# EAGLE board megacard_pipico (EAGLE 4.16)
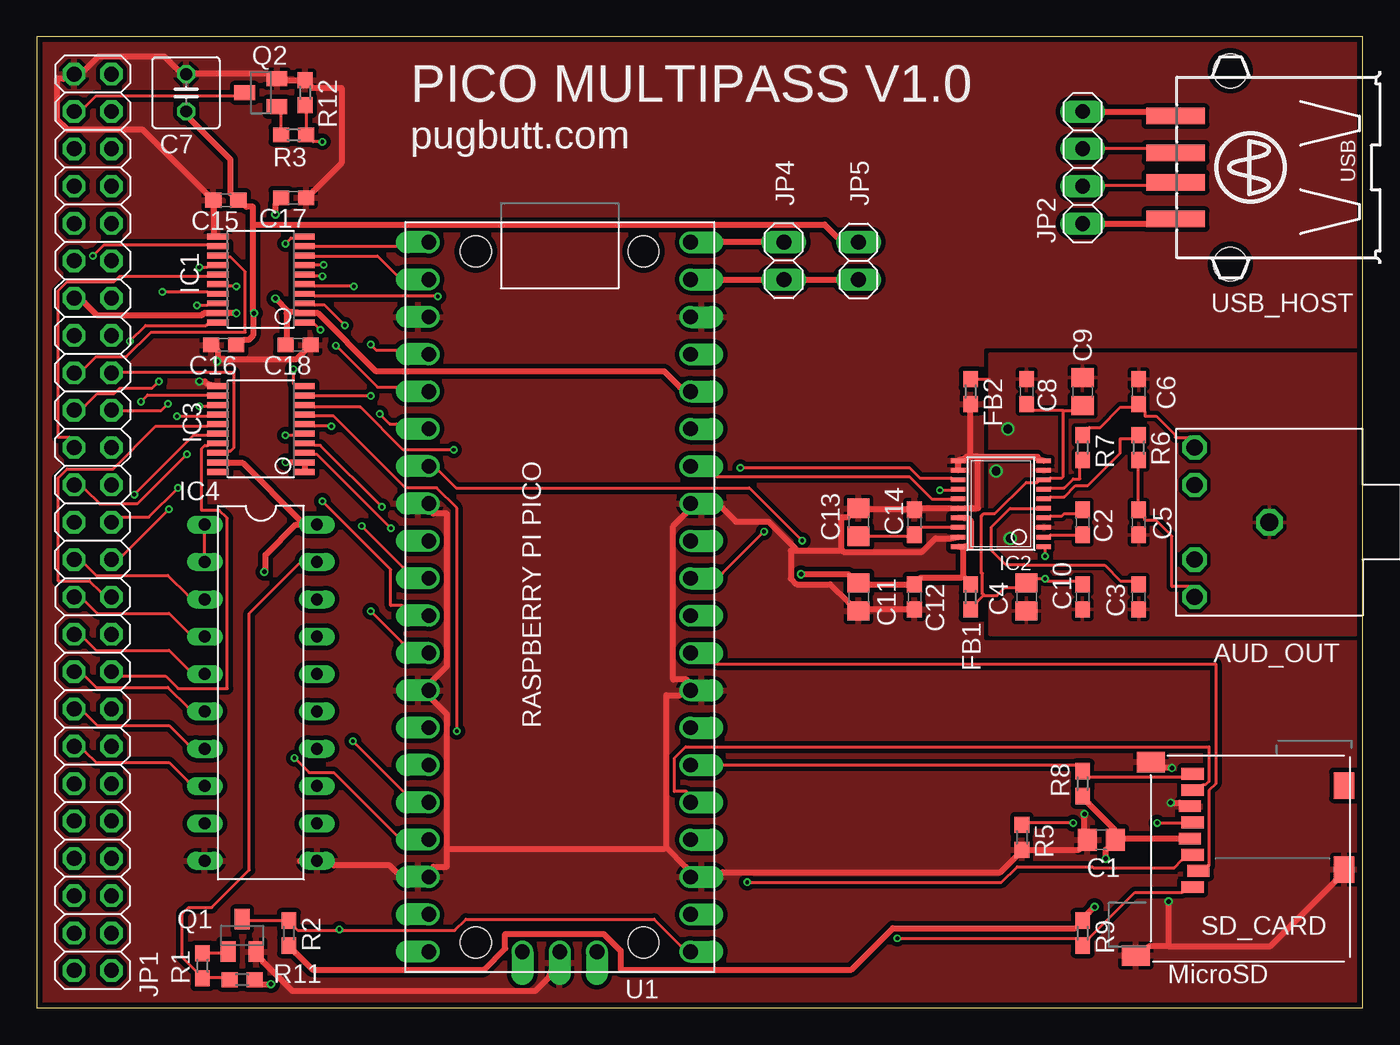
[diagram p0: board, top side]
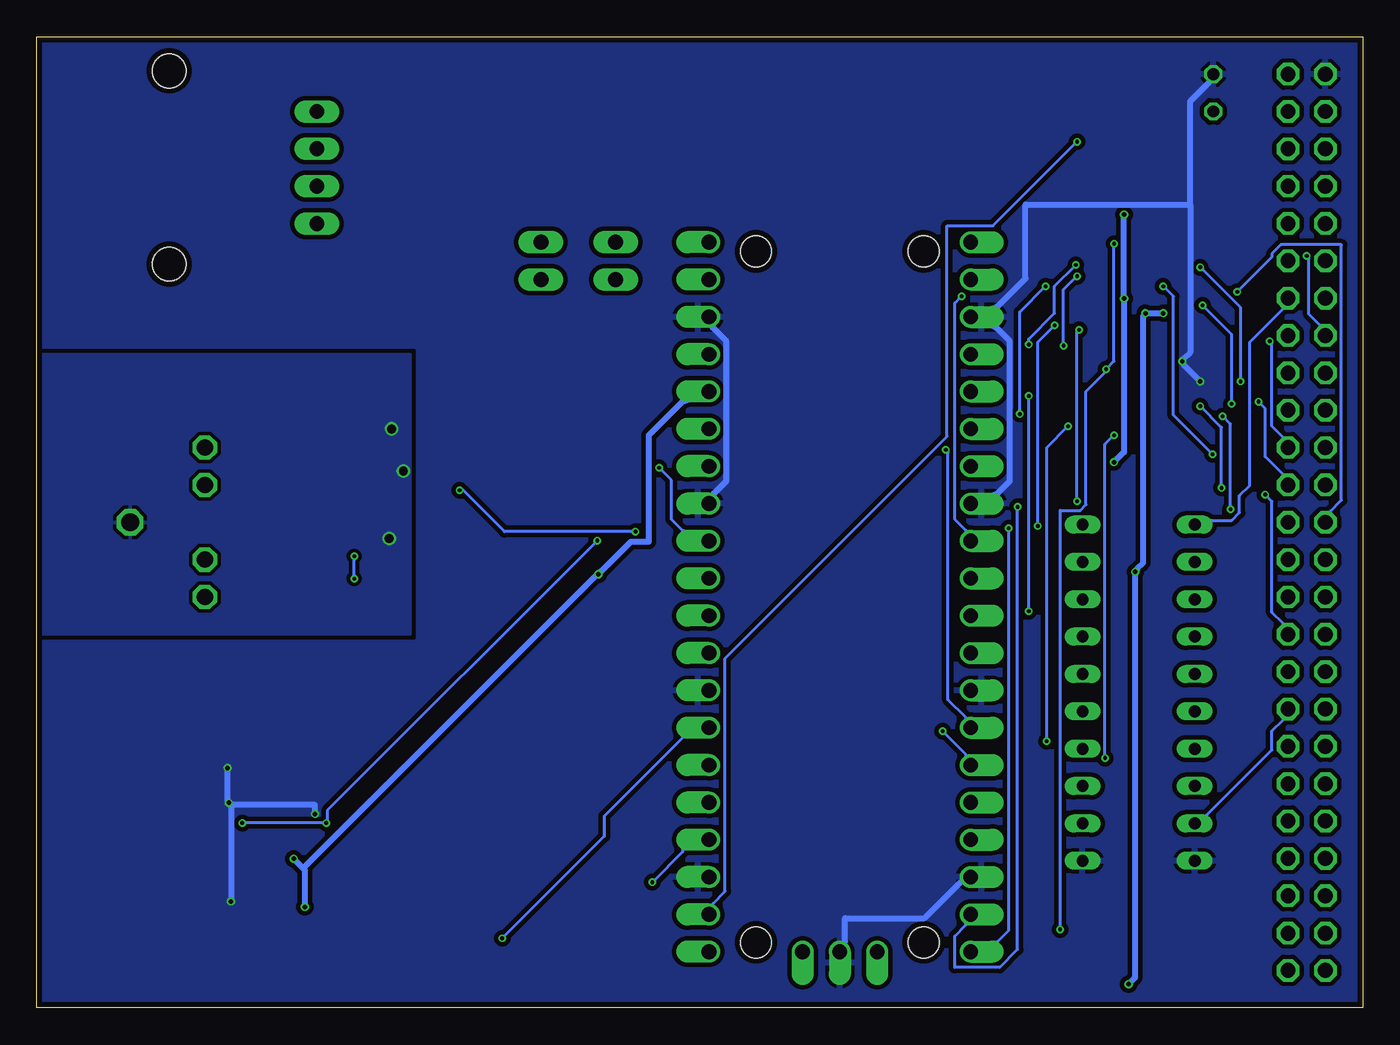
[diagram p1: board, bottom side, seen from below]

Size 90.17 x 66.04 mm. Coordinates in mm from the lower left corner, seen from the top.
Outline: 0,0 90.17,0 90.17,66.04 0,66.04 0,0
Copper layers (1*16): Top 0.0356mm / dielectric 1.6mm / Bottom 0.0356mm
Design rules "oshpark-2layer": minimum track width 6mil, minimum drill 10mil, track to track 6mil, track to pad 6mil, pad to pad 6mil, via to via 6mil, smd to smd 6mil, copper to edge 15mil, drill to drill 6mil, minimum pad ring 5mil, minimum via ring 5mil, stop-mask expansion 2.5mil, vias tented up to drill 0mil, thermal gap 10mil
Net classes: 0 default: width 0.203 mm, drill 0.203 mm, clearance 0.254 mm; 1 supply: width 0.406 mm, drill 0.203 mm, clearance 0.305 mm

## Footprints (pad centres in the part's own frame; a part is rotated, then mirrored left to right if it is on the bottom)
3.5MM_HPHONE_DIN = drill 1.2 octagon: COM 0,5.08 | drill 1.1 octagon: L 5.08,0; LSW 2.54,0; R -5.08,0; RSW -2.54,0
C0805 = smd 1.3 x 1.5: 1 -0.95,0; 2 0.95,0
C0603 = smd 1.1 x 1: 1 -0.85,0; 2 0.85,0
C025-050X050 = drill 0.813 octagon: 1 -1.27,0; 2 1.27,0
R0603 = smd 1.1 x 1: 1 -0.85,0; 2 0.85,0
TSSOP20 = smd 1.5 x 0.35: 1 -2.925,2.925; 2 -2.925,2.275; 3 -2.925,1.625; 4 -2.925,0.975; 5 -2.925,0.325; 6 -2.925,-0.325; 7 -2.925,-0.975; 8 -2.925,-1.625; 9 -2.925,-2.275; 10 -2.925,-2.925; 11 2.925,-2.925; 12 2.925,-2.275; 13 2.925,-1.625; 14 2.925,-0.975; 15 2.925,-0.325; 16 2.925,0.325; 17 2.925,0.975; 18 2.925,1.625; 19 2.925,2.275; 20 2.925,2.925
TSSOP20' = smd 0.305 x 0.991: 1 -2.925,-2.918; 2 -2.275,-2.918; 3 -1.625,-2.918; 4 -0.975,-2.918; 5 -0.325,-2.918; 6 0.325,-2.918; 7 0.975,-2.918; 8 1.625,-2.918; 9 2.275,-2.918; 10 2.925,-2.918; 11 2.925,2.918; 12 2.275,2.918; 13 1.625,2.918; 14 0.975,2.918; 15 0.325,2.918; 16 -0.325,2.918; 17 -0.975,2.918; 18 -1.625,2.918; 19 -2.275,2.918; 20 -2.925,2.918
DIL20 = drill 0.813 long: 1 -11.43,-3.81; 2 -8.89,-3.81; 3 -6.35,-3.81; 4 -3.81,-3.81; 5 -1.27,-3.81; 6 1.27,-3.81; 7 3.81,-3.81; 8 6.35,-3.81; 9 8.89,-3.81; 10 11.43,-3.81; 11 11.43,3.81; 12 8.89,3.81; 13 6.35,3.81; 14 3.81,3.81; 15 1.27,3.81; 16 -1.27,3.81; 17 -3.81,3.81; 18 -6.35,3.81; 19 -8.89,3.81; 20 -11.43,3.81
2X25 = drill 1.016 octagon: 1 -30.48,-1.27; 2 -30.48,1.27; 3 -27.94,-1.27; 4 -27.94,1.27; 5 -25.4,-1.27; 6 -25.4,1.27; 7 -22.86,-1.27; 8 -22.86,1.27; 9 -20.32,-1.27; 10 -20.32,1.27; 11 -17.78,-1.27; 12 -17.78,1.27; 13 -15.24,-1.27; 14 -15.24,1.27; 15 -12.7,-1.27; 16 -12.7,1.27; 17 -10.16,-1.27; 18 -10.16,1.27; 19 -7.62,-1.27; 20 -7.62,1.27; 21 -5.08,-1.27; 22 -5.08,1.27; 23 -2.54,-1.27; 24 -2.54,1.27; 25 0,-1.27; 26 0,1.27; 27 2.54,-1.27; 28 2.54,1.27; 29 5.08,-1.27; 30 5.08,1.27; 31 7.62,-1.27; 32 7.62,1.27; 33 10.16,-1.27; 34 10.16,1.27; 35 12.7,-1.27; 36 12.7,1.27; 37 15.24,-1.27; 38 15.24,1.27; 39 17.78,-1.27; 40 17.78,1.27; 41 20.32,-1.27; 42 20.32,1.27; 43 22.86,-1.27; 44 22.86,1.27; 45 25.4,-1.27; 46 25.4,1.27; 47 27.94,-1.27; 48 27.94,1.27; 49 30.48,-1.27; 50 30.48,1.27
1X04 = drill 1.016 long: 1 -3.81,0; 2 -1.27,0; 3 1.27,0; 4 3.81,0
1X02 = drill 1.016 long: 1 -1.27,0; 2 1.27,0
SOT23-BEC = smd 1 x 1.4: B -0.95,-1.1; C 0,1.1; E 0.95,-1.1
MICROSD_AMPHENOL_GTFP08432B1HR = smd 0.8 x 1.5: 1/DAT2 1.95,-10.3; 2/CD/DAT3 0.85,-9.9; 3/CMD -0.25,-10.3; 4/VDD -1.35,-10.5; 5/CLK -2.45,-10.3; 6/VSS -3.55,-10.5; 7/DAT0 -4.65,-10.3; 8/DAT1 -5.75,-10.3 | smd 1.8 x 1.4: CDET -4.95,0; GND0 0.75,0 | smd 1.4 x 1.9: GND1 -6.55,-13.15; GND2 6.6,-14.15
PI_PICO = drill 1 offset: 1 -8.89,24.13; 2 -8.89,21.59; 3 -8.89,19.05; 4 -8.89,16.51; 5 -8.89,13.97; 6 -8.89,11.43; 7 -8.89,8.89; 8 -8.89,6.35; 9 -8.89,3.81; 10 -8.89,1.27; 11 -8.89,-1.27; 12 -8.89,-3.81; 13 -8.89,-6.35; 14 -8.89,-8.89; 15 -8.89,-11.43; 16 -8.89,-13.97; 17 -8.89,-16.51; 18 -8.89,-19.05; 19 -8.89,-21.59; 20 -8.89,-24.13; 21 8.89,-24.13; 22 8.89,-21.59; 23 8.89,-19.05; 24 8.89,-16.51; 25 8.89,-13.97; 26 8.89,-11.43; 27 8.89,-8.89; 28 8.89,-6.35; 29 8.89,-3.81; 30 8.89,-1.27; 31 8.89,1.27; 32 8.89,3.81; 33 8.89,6.35; 34 8.89,8.89; 35 8.89,11.43; 36 8.89,13.97; 37 8.89,16.51; 38 8.89,19.05; 39 8.89,21.59; 40 8.89,24.13; D1 -2.54,-24.13; D2 0,-24.13; D3 2.54,-24.13 | hole 2.1: -5.7,23.5; 5.7,23.5; 5.7,-23.5; -5.7,-23.5
USB-A003 = smd 1.12 x 4: 1 -3.5,14; 2 -1,14; 3 1,14; 4 3.5,14 | hole 2.3: -6.57,10.28; 6.57,10.28

## Placement (x,y rotation side)
AUD_OUT  HPHONE_JACK_DIN  [3.5MM_HPHONE_DIN]  78.74,33.02 270 top
C1  10u  [C0805]  72.39,11.43 180 top
C2  2.2u  [C0603]  71.12,33.02 270 top
C3  2.2u  [C0603]  74.93,27.94 90 top
C4  10u  [C0805]  67.31,27.94 90 top
C5  2.2u  [C0603]  74.93,33.02 90 top
C6  2.2u  [C0603]  74.93,41.91 270 top
C7  220U  [C025-050X050]  10.16,62.23 90 top
C8  0.1u  [C0603]  67.31,41.91 270 top
C9  10u  [C0805]  71.12,41.91 270 top
C10  0.1u  [C0603]  71.12,27.94 90 top
C11  10u  [C0805]  55.88,27.94 270 top
C12  0.1u  [C0603]  59.69,27.94 270 top
C13  10u  [C0805]  55.88,33.02 90 top
C14  0.1u  [C0603]  59.69,33.02 90 top
C15  0.1u  [C0603]  12.86,54.93 180 top
C16  0.1u  [C0603]  12.7,45.09 180 top
C17  0.1u  [C0603]  17.46,55.09 180 top
C18  0.1u  [C0603]  17.78,45.09 180 top
FB1  [R0603]  63.5,27.94 90 top
FB2  [R0603]  63.5,41.91 270 top
IC1  TXS0108E  [TSSOP20]  15.24,49.53 180 top
IC2  PCM5101A  [TSSOP20']  65.56,34.29 90 top
IC3  TXS0108E  [TSSOP20]  15.24,39.37 180 top
IC4  PLD_ATF16V8B  [DIL20]  15.24,21.43 270 top
JP1  [2X25]  3.81,33.02 270 top
JP2  [1X04]  71.12,57.15 90 top
JP4  [1X02]  50.8,50.8 270 top
JP5  [1X02]  55.88,50.8 90 top
Q1  BC849SMD  [SOT23-BEC]  13.97,4.92 0 top
Q2  BC849SMD  [SOT23-BEC]  15.24,62.23 90 top
R1  680R  [R0603]  11.27,2.86 90 top
R2  4.7K  [R0603]  17.14,5.08 270 top
R3  680R  [R0603]  17.46,59.37 180 top
R5  10K  [R0603]  66.99,11.59 270 top
R6  470  [R0603]  74.93,38.1 90 top
R7  470  [R0603]  71.12,38.1 270 top
R8  10K  [R0603]  71.12,15.24 90 top
R9  10K  [R0603]  71.12,5.08 270 top
R11  10K  [R0603]  13.97,1.91 0 top
R12  10K  [R0603]  18.26,62.23 270 top
SD_CARD  MICROSD_AMPHENOL_GTFP084328  [MICROSD_AMPHENOL_GTFP08432B1HR]  88.9,10.16 270 top
U1  PI_PICO  [PI_PICO]  35.56,27.94 0 top
USB_HOST  [USB-A003]  91.44,57.15 90 top

## Library data of the parts
AUD_OUT IC2 = 01-hacker-daw
C1-C18 FB1 FB2 R1-R3 R5-R9 R11 R12 = rcl
IC1 IC3 IC4 SD_CARD U1 = 07-Retrocomputing
JP1 JP2 JP4 JP5 = pinhead
Q1 Q2 = transistor-npn
USB_HOST = con-yamaichi

## Nets
+3V3 [supply]: C1.1 C11.1 C12.1 C17.2 C18.2 FB1.2 IC1.2 IC2.17 IC2.20 IC3.1 IC3.2 R2.2 R8.1 R9.1 SD_CARD.4/VDD U1.36
+5V [supply]: C7.1 C15.1 C16.1 IC1.19 IC3.19 IC4.20 JP1.13 JP5.2 R11.2
/BREQ: JP1.16
/FIRQ: JP1.7
/HALT: JP1.2
/IO: IC4.9 JP1.36
/IRQ: JP1.5
/MRDY: JP1.10
/NMI: JP1.3 Q2.C
/NOMEM: JP1.38
/RD: JP1.4
/RES: JP1.8
/WR: JP1.6
_A0: IC1.9 U1.1
_A1: IC1.8 U1.2
_A2: IC1.7 U1.4
_A3: IC1.6 U1.5
_A4: IC1.5 U1.6
_A5: IC1.4 U1.9
_D0: IC1.3 U1.10
_D1: IC1.1 U1.11
_D2: IC3.9 U1.12
_D3: IC3.8 U1.14
_D4: IC3.7 U1.15
_D5: IC3.6 U1.16
_D6: IC3.5 U1.17
_D7: IC3.4 U1.19
_R//W: IC3.3 U1.20
A0: IC1.12 JP1.15
A1: IC1.13 JP1.17
A2: IC1.14 JP1.19
A3: IC1.15 JP1.21
A4: IC1.16 JP1.23
A5: IC1.17 JP1.25
A6: IC4.3 JP1.27
A7: IC4.4 JP1.29
A8: IC4.5 JP1.31
A9: IC4.6 JP1.33
A10: IC4.7 JP1.35
A11: IC4.8 JP1.37
A12: JP1.39
A13: JP1.41
A14: JP1.43
A15: JP1.45
A16: JP1.47
A17: JP1.49
A18: JP1.50
A19: JP1.48
A20: JP1.46
A21: JP1.44
A22: JP1.42
A23: JP1.40
AGND: AUD_OUT.COM C3.1 C4.1 C5.1 C6.1 C8.1 C9.1 C10.1 FB2.1 IC2.3 IC2.9
BA: JP1.11
BCK: IC2.13 U1.32
BS: JP1.9
CS: IC1.10 IC3.10 Q1.C R2.1 U1.21
D0: IC1.18 JP1.20
D1: IC1.20 JP1.22
D2: IC3.12 JP1.24
D3: IC3.13 JP1.26
D4: IC3.14 JP1.28
D5: IC3.15 JP1.30
D6: IC3.16 JP1.32
D7: IC3.17 JP1.34
DOUT: IC2.14 U1.31
ECLK: IC4.1 IC4.2 JP1.14
GND [supply]: C1.2 C7.2 C11.2 C12.2 C13.2 C14.2 C15.2 C16.2 C17.1 C18.1 FB2.2 IC1.11 IC2.10 IC2.11 IC2.12 IC2.16 IC2.19 IC3.11 IC4.10 IC4.11 JP1.1 Q1.E Q2.E R5.2 R12.1 SD_CARD.6/VSS SD_CARD.GND0 SD_CARD.GND1 SD_CARD.GND2 U1.3 U1.8 U1.13 U1.18 U1.23 U1.28 U1.33 U1.38 U1.D2
INT: R3.1 R12.2 U1.22
LDOO: C13.1 C14.1 IC2.18
LRCLK: IC2.15 U1.34
N$1 [supply]: JP2.1 USB_HOST.1
N$2: JP2.2 USB_HOST.2
N$3: JP2.3 USB_HOST.3
N$4 [supply]: JP2.4 USB_HOST.4
N$5: Q1.B R1.2
N$6 [supply]: JP4.1 U1.40
N$8 [supply]: JP4.2 JP5.1 U1.39
N$19: Q2.B R3.2
N$21: AUD_OUT.L C5.2 R6.1
N$22: AUD_OUT.R C6.2 R7.1
N$23: C2.2 IC2.2
N$24: C2.1 IC2.4
N$26: C3.2 IC2.5
N$27: IC2.6 R6.2
N$28: IC2.7 R7.2
PCS: IC4.19 R1.1 R11.1
QCLK: JP1.12
R//W: IC3.18 JP1.18
SD_CLK: R5.1 SD_CARD.5/CLK U1.7
SD_CND: SD_CARD.3/CMD U1.24
SD_DAT0: SD_CARD.7/DAT0 U1.25
SD_DAT1: R8.2 SD_CARD.8/DAT1 U1.26
SD_DAT2: R9.2 SD_CARD.1/DAT2 U1.27
SD_DAT3: SD_CARD.2/CD/DAT3 U1.29
VDD: C4.2 C8.2 C9.2 C10.2 FB1.1 IC2.1 IC2.8

## Tracks (layer width: path | path; a pad name or v marks a point on that pad's centre or on a via)
+3V3  (via drill 0.3)
  Top 0.406: R8.1 71.55,13.87 73.3,12.12 C1.1 | SD_CARD.4/VDD 77.72,11.51 73.91,11.51 C1.1 | R2.2 17.6,3.73 18.75,2.59 30.4,2.59 31.85,4.04 31.85,5.03 38.56,5.03 39.7,3.89 39.7,2.59 55.4,2.59 58.22,5.41 70.64,5.41 R9.1 71.55,6.48 v71.93,6.86 | v72.69,10.13 72.69,10.74 C1.1 | 63.02,29.34 63.02,31.24 IC2.20 63.09,31.39 63.55,31.39 63.55,33.07 63.32,33.3 63.09,33.3 IC2.17 | 63.02,29.34 FB1.2 | 63.02,29.34 62.87,29.26 60.12,29.26 C12.1 59.21,28.8 56.62,28.8 C11.1 55.17,29.49 v51.97,29.49 | IC3.1 18.21,36.58 18.21,36.96 IC3.2 17.45,37.11 v16.92,37.11 | v16.23,53.95 16.23,54.63 C17.2 | 17.11,47.36 17.14,47.32 17.45,47.32 IC1.2 18.9,47.24 19.13,47.24 23.09,43.28 42.67,43.28 43.74,42.22 U1.36 | 17.11,47.36 v16.23,48.23 | C18.2 16.99,45.57 16.99,47.24 17.11,47.36
  Bottom 0.406: 72.05,9.49 71.93,9.37 v71.93,6.86 | 72.05,9.49 v72.69,10.13 | v16.23,53.95 v16.23,48.23 16.23,37.8 v16.92,37.11 | U1.36 46.25,41.22 48.54,38.94 48.54,31.7 49.76,31.7 v51.97,29.49 52.2,29.34 72.05,9.49
+5V  (via drill 0.3)
  Top 0.406: v15.93,1.6 15.32,1.6 R11.2 | IC3.19 13.03,37.03 14.02,37.03 17.91,33.15 IC4.20 17.62,32.86 15.56,30.8 15.56,29.69 v15.47,29.64 | JP1.13 3.28,47.93 4.12,47.09 11.2,47.09 11.35,47.24 11.58,47.24 IC1.19 13.03,47.24 v13.56,47.24 | 14.71,53.26 14.71,54.48 14.25,54.48 C15.1 13.18,55.4 13.18,57.68 10.44,60.43 C7.1 | 14.71,47.24 14.71,53.26 | 14.71,47.24 14.71,45.72 14.4,45.41 14.1,45.41 C16.1 | JP5.2 54.41,52.43 53.57,53.26 14.71,53.26 | v14.78,47.24 14.71,47.24
  Bottom 0.406: v15.93,1.6 15.47,2.06 v15.47,29.64 15.32,29.87 14.94,30.25 14.94,47.02 v14.78,47.24 v13.56,47.24
/IO
  Bottom 0.203: IC4.9 10.59,13.11 6.17,17.53 6.17,18.82 5.41,19.58 JP1.36
/NMI
  Top 0.203: Q2.C 13.49,62.03 4.04,62.03 3.28,61.27 JP1.3
_A0
  Top 0.203: IC1.9 18.9,51.82 24.46,51.82 U1.1
_A1
  Top 0.203: IC1.8 18.9,51.13 23.16,51.13 24.46,49.84 U1.2
_A2  (via drill 0.25)
  Top 0.203: v19.51,50.52 18.9,50.52 IC1.7 | v22.71,45.11 23.09,44.73 24.46,44.73 U1.4
  Bottom 0.203: v19.51,50.52 20.95,49.07 20.95,47.24 22.71,45.49 v22.71,45.11
_A3  (via drill 0.25)
  Top 0.203: v19.43,49.76 18.9,49.76 IC1.6 | v20.34,45.03 23.16,42.22 24.46,42.22 U1.5
  Bottom 0.203: v19.43,49.76 20.34,48.84 v20.34,45.03
_A4  (via drill 0.25)
  Top 0.203: v21.57,49.07 18.9,49.07 IC1.5 | v23.32,40.39 24,39.7 24.46,39.7 U1.6
  Bottom 0.203: v21.57,49.07 23.32,47.32 v23.32,40.39
_A5  (via drill 0.25)
  Top 0.203: v27.28,48.39 18.9,48.39 IC1.4
  Bottom 0.203: v27.28,48.39 27.74,47.93 27.74,33.22 26.98,32.46 U1.9
_D0  (via drill 0.25)
  Top 0.203: v20.95,46.41 19.58,47.78 18.9,47.78 IC1.3 | v22.1,32.77 24.92,29.95 U1.10
  Bottom 0.203: v20.95,46.41 22.1,45.26 v22.1,32.77
_D1  (via drill 0.25)
  Top 0.203: v19.28,46.1 18.9,46.48 IC1.1 | v19.43,34.44 24.08,29.79 24.08,27.36 24.84,27.36 U1.11
  Bottom 0.203: v19.28,46.1 19.43,45.95 v19.43,34.44
_D2  (via drill 0.25)
  Top 0.203: v22.71,41.6 18.9,41.6 IC3.9 | v22.71,26.98 24.84,24.84 U1.12
  Bottom 0.203: v22.71,26.98 v22.71,41.6
_D3  (via drill 0.25)
  Top 0.203: v28.35,37.95 24.92,37.95 22.02,40.84 18.9,40.84 IC3.8
  Bottom 0.203: v28.35,37.95 28.19,37.8 28.19,20.95 26.98,19.74 U1.14
_D4  (via drill 0.25)
  Top 0.203: v28.57,18.82 28.57,33.98 27.2,35.36 25.07,35.36 20.19,40.23 18.9,40.23 IC3.7
  Bottom 0.203: v28.57,18.82 26.98,17.22 U1.15
_D5  (via drill 0.25)
  Top 0.203: v20.04,39.55 18.9,39.55 IC3.6 | v21.49,18.14 24.92,14.71 U1.16
  Bottom 0.203: v20.04,39.55 21.49,38.1 v21.49,18.14
_D6  (via drill 0.25)
  Top 0.203: v16.92,38.94 17.45,38.94 IC3.5 | v17.53,16.99 18.52,16 20.19,16 24.46,11.73 U1.17
  Bottom 0.203: v16.92,38.94 17.53,38.33 v17.53,16.99
_D7  (via drill 0.25)
  Top 0.203: v23.47,34.06 19.28,38.25 18.9,38.25 IC3.4
  Bottom 0.203: v23.47,34.06 23.47,3.96 24.69,2.74 27.74,2.74 27.74,4.88 26.98,5.64 U1.19
_R//W  (via drill 0.25)
  Top 0.203: v24.08,32.61 19.05,37.64 18.9,37.64 IC3.3
  Bottom 0.203: v24.08,32.61 24.08,5.26 24.84,4.5 U1.20
A0  (via drill 0.25)
  Top 0.203: v3.81,51.13 4.57,51.89 11.58,51.89 IC1.12
  Bottom 0.203: v3.81,51.13 3.66,50.98 3.66,47.17 2.9,46.41 JP1.15
A1
  Top 0.203: IC1.13 13.03,51.05 13.18,51.05 14.17,50.06 14.17,45.95 7.77,45.95 6.1,44.27 4.04,44.27 3.28,43.51 JP1.17
A2  (via drill 0.25)
  Top 0.203: v11.05,50.37 11.58,50.37 IC1.14 | v8.31,42.6 7.85,42.14 5.64,42.14 5.26,41.76 4.12,41.76 3.28,40.92 JP1.19
  Bottom 0.203: v11.05,50.37 8.31,47.62 v8.31,42.6
A3
  Top 0.203: IC1.15 11.58,49.76 5.64,49.76 5.26,49.38 2.06,49.38 1.45,48.77 1.45,38.79 2.21,38.79 JP1.21
A4  (via drill 0.25)
  Top 0.203: v13.56,49.07 13.03,49.07 IC1.16 | v10.21,37.64 6.86,34.29 4.27,34.29 3.28,35.28 JP1.23
  Bottom 0.203: v13.56,49.07 12.88,48.39 12.88,40.31 v10.21,37.64
A5  (via drill 0.25)
  Top 0.203: v8.53,48.69 11.58,48.69 IC1.17
  Bottom 0.203: v8.53,48.69 6.17,51.05 6.17,51.28 5.56,51.89 1.45,51.89 1.45,34.52 2.21,33.76 JP1.25
A6
  Top 0.203: IC4.3 10.29,28.04 8.91,29.41 4.04,29.41 3.28,30.18 JP1.27
A7
  Top 0.203: IC4.4 10.29,25.53 8.99,26.82 4.12,26.82 3.28,27.66 JP1.29
A8
  Top 0.203: IC4.5 10.29,23.01 8.99,24.31 4.04,24.31 3.28,25.07 JP1.31
A9
  Top 0.203: IC4.6 10.29,20.42 8.91,21.79 4.04,21.79 3.28,22.55 JP1.33
A10
  Top 0.203: IC4.7 10.29,17.91 8.99,19.2 4.12,19.2 3.28,20.04 JP1.35
A11
  Top 0.203: IC4.8 10.29,15.39 8.99,16.69 4.04,16.69 3.28,17.45 JP1.37
AGND  (via drill 0.6)
  Top 0.203: FB2.1 63.93,42.75 64.77,42.75
  other vias: 66.04,39.37 65.25,36.51 66.2,31.91
  pour Bottom: 90.17,44.45 64.77,44.45 64.77,25.4 90.17,25.4
  pour Top: 64.77,44.45 64.77,25.4 90.17,25.4 90.17,44.45
BCK  (via drill 0.25)
  Top 0.203: v47.85,36.73 59.36,36.73 60.05,36.04 62.18,36.04 IC2.13
  Bottom 0.203: v47.85,36.73 47.02,35.89 47.02,33.22 46.25,32.46 U1.32
CS  (via drill 0.25)
  Top 0.203: v17.45,43.43 17.45,42.44 IC3.10 | v16.92,51.97 17.3,52.35 17.45,52.35 IC1.10 | Q1.C 14.4,5.94 16.69,5.94 R2.1 17.6,5.41 17.75,5.26 20.57,5.26 | 20.57,5.26 28.42,5.26 29.18,6.02 41.99,6.02 43.81,4.19 U1.21 | 20.57,5.26 v20.57,5.33
  Bottom 0.203: v16.92,51.97 16.92,43.97 v17.45,43.43 17.53,43.2 18.82,41.91 18.82,34.21 19.2,33.83 20.57,33.83 v20.57,5.33
D0  (via drill 0.25)
  Top 0.203: v10.9,47.78 11.58,47.78 IC1.18 | v8.91,41.07 8.46,40.62 5.79,40.62 JP1.20
  Bottom 0.203: v10.9,47.78 8.91,45.8 v8.91,41.07
D1  (via drill 0.25)
  Top 0.203: v6.33,45.34 7.39,46.41 11.51,46.41 11.58,46.48 IC1.20
  Bottom 0.203: v6.33,45.34 6.17,45.19 6.17,39.55 5.41,38.79 JP1.22
D2  (via drill 0.25)
  Top 0.203: v7.09,41.22 7.54,41.68 11.58,41.68 IC3.12
  Bottom 0.203: v7.09,41.22 6.63,40.77 6.63,37.49 5.41,36.27 JP1.24
D3  (via drill 0.25)
  Top 0.203: v11.05,40.92 11.58,40.92 IC3.13 | v9.6,35.36 7.62,33.38 5.79,33.38 JP1.26
  Bottom 0.203: v11.05,40.92 9.6,39.47 v9.6,35.36
D4  (via drill 0.25)
  Top 0.203: v9.53,40.23 11.58,40.23 IC3.14 | v8.99,33.91 5.87,30.79 5.79,30.79 JP1.28
  Bottom 0.203: v9.53,40.23 8.99,39.7 v8.99,33.91
D5
  Top 0.203: IC3.15 11.58,39.55 8.08,39.55 5.18,36.65 2.06,36.65 1.45,36.04 1.45,29.03 3.58,29.03 4.34,28.27 JP1.30
D6  (via drill 0.25)
  Top 0.203: v6.63,34.9 10.67,38.94 11.58,38.94 IC3.16
  Bottom 0.203: v6.63,34.9 6.17,34.44 6.17,26.9 5.41,26.14 JP1.32
D7
  Top 0.203: IC3.17 11.58,38.25 11.43,38.25 11.2,38.02 11.2,33.83 12.42,33.83 12.95,33.3 12.95,21.72 9.6,21.72 8.76,22.55 5.79,22.55 JP1.34
DOUT  (via drill 0.25)
  Top 0.203: v61.42,35.2 62.18,35.2 IC2.14 | v49.45,32.38 46.63,29.57 U1.31
  Bottom 0.203: v61.42,35.2 61.19,35.2 58.37,32.38 v49.45,32.38
ECLK
  Top 0.203: IC4.2 IC4.1
  Bottom 0.203: JP1.14 5.41,47.55 7.7,45.26 7.7,35.51 8.38,34.82 8.38,33.68 8.91,33.15 10.29,33.15 IC4.1
GND  (via drill 0.3)
  Top 0.406: IC2.12 62.64,36.65 62.64,37.11 IC2.11 63.09,37.34 63.25,37.49 63.48,37.49 | 64.01,37.49 63.48,37.49 | 64.01,37.49 68.05,37.49 68.05,37.34 IC2.10 | FB2.2 63.48,40.54 63.48,37.49 | C12.2 59.21,27.13 56.62,27.13 C11.2 55.17,27.58 53.95,28.8 51.66,28.8 51.28,29.18 51.28,31.09 51.59,31.09 | 54.71,31.17 54.86,31.01 60.2,31.01 61.11,31.93 62.18,31.93 IC2.19 | 54.71,31.17 54.71,33.38 55.17,33.38 C13.2 56.62,33.91 59.21,33.91 C14.2 60.12,33.98 62.18,33.98 IC2.16 63.09,33.98 64.01,33.98 64.01,37.49 | 51.59,31.09 54.56,31.09 54.71,31.17 | 51.59,31.09 51.59,31.24 49.76,33.07 47.55,33.07 46.63,33.98 U1.33 44.12,33.6 43.28,32.77 43.28,22.33 44.2,22.33 U1.28 43.74,21.26 42.82,21.26 42.82,10.9 | 76.96,4.19 75.67,4.19 SD_CARD.GND2 | 76.96,4.19 83.9,4.19 88.24,8.53 SD_CARD.GND0 | v77.11,13.95 77.72,13.95 SD_CARD.6/VSS | v77.19,16.31 76.66,16.31 SD_CARD.GND1 | 42.82,10.9 44.12,9.6 U1.23 46.63,9.22 65.53,9.22 66.52,10.21 R5.2 67.44,10.74 70.87,10.74 C1.2 71.25,12.12 v71.25,13.18 | v76.96,7.24 76.96,4.19 | IC1.11 12.04,52.58 12.04,54.48 C15.2 11.51,55.4 7.16,59.74 2.06,59.74 1.37,60.43 1.37,63.17 1.83,63.17 JP1.1 3.28,63.78 4.19,64.69 8.69,64.69 9.6,63.78 C7.2 10.74,63.55 15.7,63.55 Q2.E 16.99,63.09 17.83,63.09 R12.1 18.75,62.56 20.73,62.56 20.73,57.45 18.82,55.55 C17.1 | 12.34,44.12 12.34,44.65 C16.2 | 12.34,44.12 17.68,44.12 18.21,44.65 C18.1 | v11.05,42.6 11.43,42.6 11.58,42.44 IC3.11 | v12.27,43.97 12.34,44.12 | U1.8 26.98,33.6 27.89,33.6 27.89,23.24 26.98,22.33 U1.13 26.98,20.88 27.89,19.96 27.89,10.82 | 17.91,9.98 IC4.11 20.19,9.68 24,9.68 24.46,9.22 U1.18 26.98,9.6 27.89,9.6 27.89,10.82
  Top 0.406: Q1.E 15.39,3.12 17.37,1.14 33.91,1.14 34.82,2.06 U1.D2 | 42.82,10.9 42.67,10.82 27.89,10.82
  Bottom 0.406: U1.38 44.2,46.25 43.28,45.34 43.28,35.81 44.12,34.98 U1.33 | v77.19,16.31 77.19,14.02 v77.11,13.95 76.89,13.79 | 76.89,13.79 71.25,13.79 v71.25,13.18 | v76.96,7.24 76.96,13.64 76.89,13.79 | v11.05,42.6 12.27,43.81 v12.27,43.97 12.12,44.2 11.73,44.58 11.73,54.63 | 11.73,54.63 11.73,61.65 10.44,62.94 C7.2 | U1.8 24.84,34.98 24,35.81 24,45.34 24.92,46.25 U1.3 24.84,47.7 22.94,49.61 22.94,54.63 11.73,54.63 | U1.18 27.36,8.53 29.79,6.1 35.2,6.1 35.2,4.5 U1.D2
  pour Bottom (rank 2): 0,66.04 90.17,66.04 90.17,0 0,0
  pour Top (rank 2): 0,66.04 90.17,66.04 90.17,0 0,0
INT  (via drill 0.25)
  Top 0.203: R12.2 18.36,60.88 18.36,59.82 R3.1 18.82,58.9 v19.43,58.9
  Bottom 0.203: v19.43,58.9 25.15,53.19 28.27,53.19 28.27,38.86 43.36,23.77 43.36,7.92 44.2,7.09 U1.22
LDOO
  Top 0.203: IC2.18 62.18,32.69 60.12,32.69 C14.1 59.21,32.08 56.62,32.08 C13.1
LRCLK
  Top 0.203: IC2.15 62.18,34.59 60.88,34.59 59.36,36.12 46.25,36.12 U1.34
N$1
  Top 0.406: JP2.1 75.51,53.34 USB_HOST.1
N$2
  Top 0.203: JP2.2 72.62,55.93 75.51,55.93 USB_HOST.2
N$3
  Top 0.203: JP2.3 72.62,58.45 75.51,58.45 USB_HOST.3
N$4
  Top 0.406: JP2.4 75.51,60.96 USB_HOST.4
N$5
  Top 0.203: R1.2 11.73,3.73 12.57,3.73 Q1.B
N$6
  Top 0.406: U1.40 46.63,52.12 49.3,52.12 JP4.1
N$8
  Top 0.406: U1.39 JP4.2 JP5.1
N$19
  Top 0.203: R3.2 16.61,59.82 16.61,60.81 Q2.B
N$21
  Top 0.203: R6.1 74.91,36.73 74.91,34.37 C5.2 75.36,33.38 75.36,33.15 76.12,33.15 77.19,32.08 77.19,28.65 78.33,28.65 AUD_OUT.L
N$22
  Top 0.203: R7.1 71.55,39.47 72.31,39.47 73.69,40.84 74.45,40.84 C6.2 75.36,40.54 75.36,40.23 76.12,40.23 77.42,38.94 77.42,38.79 78.33,38.79 AUD_OUT.R
N$23
  Top 0.203: IC2.2 68.96,32.16 70.64,32.16 C2.2
N$24
  Top 0.203: IC2.4 68.96,33.45 69.72,33.45 69.88,33.6 70.64,33.6 C2.1
N$26
  Top 0.203: C3.2 74.45,29.03 73.69,29.03 72.62,30.1 67.21,30.1 67.15,30.16 65.88,30.16 64.93,31.11 64.93,32.7 66.19,33.97 IC2.5
N$27
  Top 0.203: IC2.6 68.96,34.75 69.88,34.75 70.64,35.51 71.48,35.51 73.69,37.72 73.69,38.71 74.45,38.71 R6.2
N$28
  Top 0.203: IC2.7 68.96,35.36 69.88,35.36 70.48,35.97 70.94,35.97 70.94,36.73 R7.2
PCS
  Top 0.203: R11.1 12.57,2.06 11.73,2.06 R1.1 10.82,2.52 9.91,3.43 9.91,6.48 9.97,6.48 10.32,6.83 11.91,6.83 14.45,9.37 14.45,26.83 17.94,30.32 IC4.19
R//W
  Top 0.203: IC3.18 13.03,37.87 13.18,37.87 13.41,38.1 13.41,43.2 5.79,43.2 JP1.18
SD_CLK  (via drill 0.25)
  Top 0.203: v70.48,12.57 67.44,12.57 R5.1 | v76.2,12.57 77.88,12.57 SD_CARD.5/CLK | v52.05,31.77 48.46,35.36 28.5,35.36 27.36,36.5 U1.7
  Bottom 0.203: v76.2,12.57 v70.48,12.57 70.41,12.8 70.41,13.41 v52.05,31.77
SD_CND  (via drill 0.25)
  Top 0.203: v48.31,8.53 65.61,8.53 66.67,9.6 71.78,9.6 71.86,9.53 77.34,9.53 77.88,10.06 SD_CARD.3/CMD
  Bottom 0.203: v48.31,8.53 46.25,10.59 46.25,10.74 U1.24
SD_DAT0
  Top 0.203: SD_CARD.7/DAT0 79.32,15.16 79.48,15.16 79.7,15.39 79.7,17.75 44.12,17.75 43.36,16.99 43.36,14.71 44.2,14.71 U1.25
SD_DAT1
  Top 0.203: SD_CARD.8/DAT1 77.88,15.7 71.55,15.7 R8.2 70.64,16.54 46.63,16.54 U1.26
SD_DAT2  (via drill 0.25)
  Top 0.203: SD_CARD.1/DAT2 77.88,7.85 74.68,7.85 71.55,4.72 R9.2 70.64,4.72 v58.52,4.72
  Bottom 0.203: v58.52,4.72 51.59,11.66 51.59,13.03 46.25,18.36 U1.27
SD_DAT3
  Top 0.203: SD_CARD.2/CD/DAT3 79.7,9.68 79.7,14.78 80.16,15.24 80.16,23.39 46.25,23.39 U1.29
VDD  (via drill 0.25)
  Top 0.203: 69.8,40.62 69.8,36.12 69.72,36.04 68.96,36.04 IC2.8 68.05,35.81 68.05,35.74 67.28,35.74 65.15,33.6 64.39,33.6 64.24,33.45 64.24,29.57 64.31,29.57 64.31,28.12 64.39,28.12 64.39,28.04 | 69.8,40.62 70.41,40.62 C9.2 | C8.2 67.74,40.62 69.8,40.62 | v68.58,30.71 68.58,31.24 IC2.1 | 64.39,28.04 63.93,27.58 FB1.1 | 64.39,28.04 65.3,28.04 65.84,28.57 66.6,28.57 C4.2 68.05,29.18 v68.58,29.18 68.73,29.03 70.64,29.03 C10.2
  Bottom 0.203: v68.58,29.18 v68.58,30.71

## Text on the board
tPlace: PICO MULTIPASS V1.0 | pugbutt.com